# EAGLE board esquematico_placa (EAGLE 9.4.2)
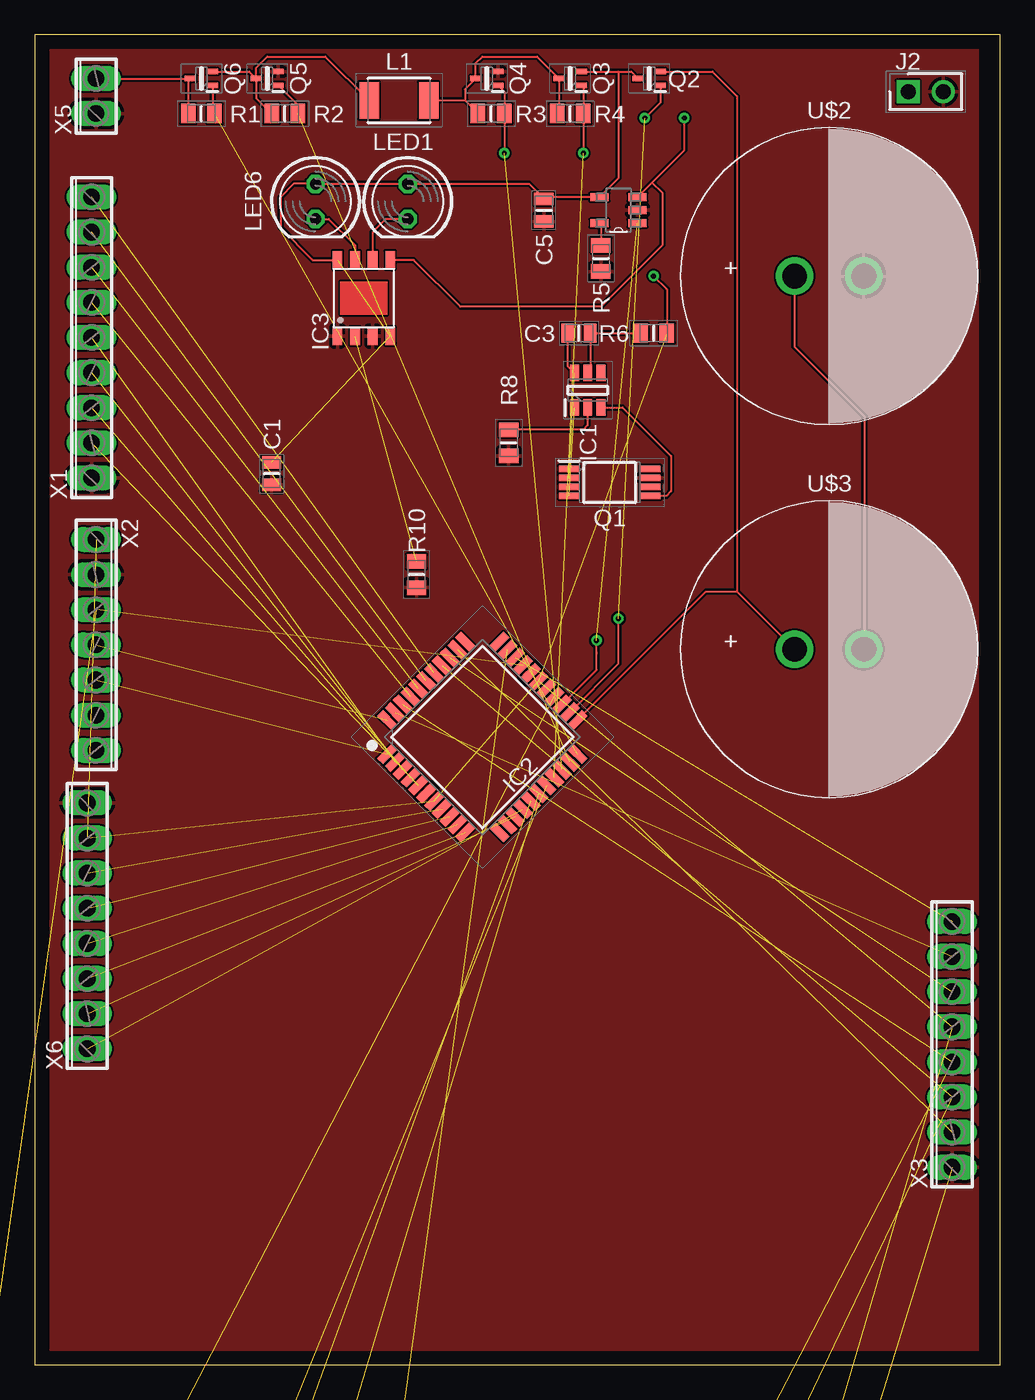
[diagram p0: board, top side]
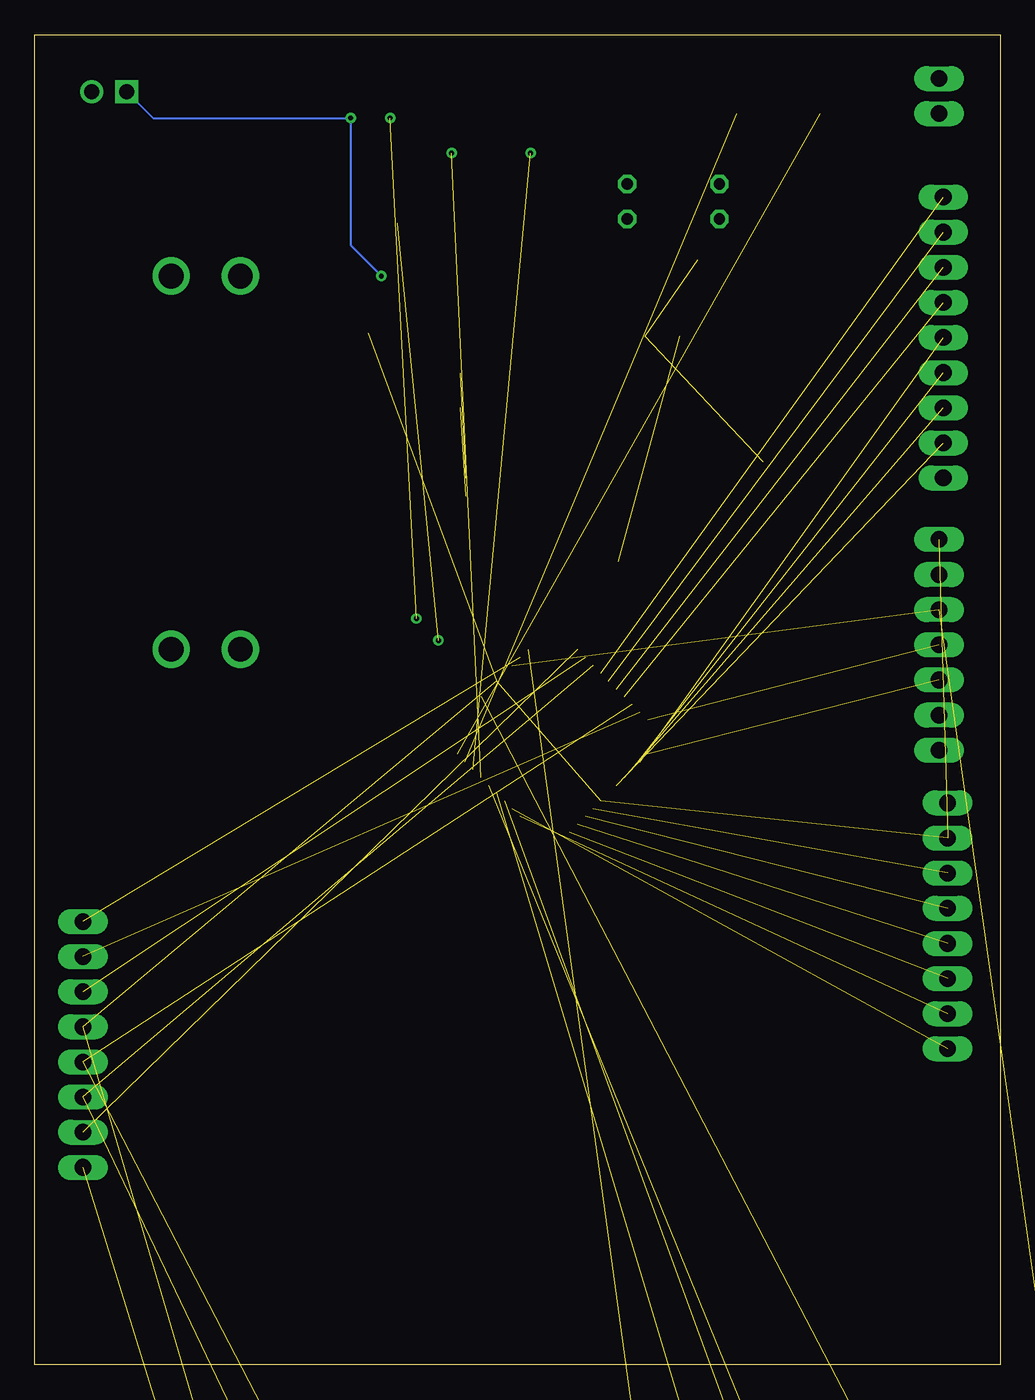
[diagram p1: board, bottom side, seen from below]

Size 69.85 x 96.2 mm. Coordinates in mm from the lower left corner, seen from the top.
Outline: 69.85,96.2 0,96.2 0,0 69.85,0 69.85,96.2
Copper layers (1*16): Top 0.035mm / dielectric 1.5mm / Bottom 0.035mm
Design rules "default": minimum track width 6mil, minimum drill 0.35mm, track to track 6mil, track to pad 6mil, pad to pad 6mil, via to via 6mil, smd to smd 6mil, copper to edge 40mil, drill to drill 6mil, minimum pad ring 10mil, minimum via ring 8mil, stop-mask expansion 4mil, vias tented up to drill 0mil, thermal gap 10mil

## Footprints (pad centres in the part's own frame; a part is rotated, then mirrored left to right if it is on the bottom)
CAPC2012X70N = smd 0.91 x 1.39: 1 -0.82,0; 2 0.82,0
SOT95P280X135-6N = smd 1.2 x 0.65: 1 -1.25,0.95; 2 -1.25,0; 3 -1.25,-0.95; 4 1.25,-0.95; 5 1.25,0; 6 1.25,0.95
QFP80P1200X1200X120-44N = smd 1.475 x 0.6: 1 -5.738,4; 2 -5.738,3.2; 3 -5.738,2.4; 4 -5.738,1.6; 5 -5.738,0.8; 6 -5.738,0; 7 -5.738,-0.8; 8 -5.738,-1.6; 9 -5.738,-2.4; 10 -5.738,-3.2; 11 -5.738,-4; 23 5.738,-4; 24 5.738,-3.2; 25 5.738,-2.4; 26 5.738,-1.6; 27 5.738,-0.8; 28 5.738,0; 29 5.738,0.8; 30 5.738,1.6; 31 5.738,2.4; 32 5.738,3.2; 33 5.738,4 | smd 0.6 x 1.475: 12 -4,-5.738; 13 -3.2,-5.738; 14 -2.4,-5.738; 15 -1.6,-5.738; 16 -0.8,-5.738; 17 0,-5.738; 18 0.8,-5.738; 19 1.6,-5.738; 20 2.4,-5.738; 21 3.2,-5.738; 22 4,-5.738; 34 4,5.738; 35 3.2,5.738; 36 2.4,5.738; 37 1.6,5.738; 38 0.8,5.738; 39 0,5.738; 40 -0.8,5.738; 41 -1.6,5.738; 42 -2.4,5.738; 43 -3.2,5.738; 44 -4,5.738
SOP-8 = smd 1.3 x 0.7: 1 -2.75,1.905; 2 -2.75,0.635; 3 -2.75,-0.635; 4 -2.75,-1.905; 5 2.75,-1.905; 6 2.75,-0.635; 7 2.75,0.635; 8 2.75,1.905
HDRV2W90P0X254_1X2_508X241X854 = drill 1.1 pad 1.65 square: 1 0,0 | drill 1.1 pad 1.65: 2 2.54,0
INDM4532X320N = smd 1.4 x 2.65: 1 -2.15,0; 2 2.15,0
LED5MM = drill 0.813 octagon: A -1.27,0; K 1.27,0
SOT95P300X145-5N = smd 1.321 x 0.559: 1 -1.372,0.94; 2 -1.372,0; 3 -1.372,-0.94; 4 1.372,-0.94; 5 1.372,0.94
SOP65P640X120-8N = smd 1.475 x 0.45: 1 -2.938,0.975; 2 -2.938,0.325; 3 -2.938,-0.325; 4 -2.938,-0.975; 5 2.938,-0.975; 6 2.938,-0.325; 7 2.938,0.325; 8 2.938,0.975
SOT50P160X90-3N = smd 0.8 x 0.4: 1 -0.8,0.5; 2 -0.8,-0.5; 3 0.8,0
RESC2012X70N = smd 1.05 x 1.4: 1 -0.95,0; 2 0.95,0
B3F-10XX = drill 1.016 long: 1 -3.251,2.261; 2 3.251,2.261; 3 -3.251,-2.261; 4 3.251,-2.261
QFN100P300X300X100-7N = smd 0.5 x 0.5: 1 -1.25,1; 2 -1.25,0; 3 -1.25,-1; 4 1.25,-1; 5 1.25,0; 6 1.25,1 | smd 1.5 x 2: PAD 0,-0.2
TEMP-HUM-SENSOR-DHT22 = drill 0.8 square: 1 -3.81,0 | drill 0.8: 2 -1.27,0; 3 1.27,0; 4 3.81,0
KW-5R5C105-R = drill 1.8 pad 2.7: 1 -2.5,0; 2 2.5,0
9POL254 = drill 1.2 long: 1 -10.16,0; 2 -7.62,0; 3 -5.08,0; 4 -2.54,0; 5 0,0; 6 2.54,0; 7 5.08,0; 8 7.62,0; 9 10.16,0
7POL254 = drill 1.2 long: 1 -7.62,0; 2 -5.08,0; 3 -2.54,0; 4 0,0; 5 2.54,0; 6 5.08,0; 7 7.62,0
8POL254 = drill 1.2 long: 1 -8.89,0; 2 -6.35,0; 3 -3.81,0; 4 -1.27,0; 5 1.27,0; 6 3.81,0; 7 6.35,0; 8 8.89,0
3POL254 = drill 1.2 long: 1 -2.54,0; 2 0,0; 3 2.54,0
2POL254 = drill 1.2 long: 1 -1.27,0; 2 1.27,0

## Placement (x,y rotation side)
C1  10uF  [CAPC2012X70N]  17.14,64.45 270 top
C2  10pF 25V  [CAPC2012X70N]  37.47,-76.52 0 top  (outside the outline)
C3  0.1uF  [CAPC2012X70N]  39.37,74.61 180 top
C4  0.1uF  [CAPC2012X70N]  -28.57,-75.88 0 top  (outside the outline)
C5  4.7 uF 16V  [CAPC2012X70N]  36.83,83.5 90 top
C6  4.7 uF 16V  [CAPC2012X70N]  -1.27,-79.69 0 top  (outside the outline)
C7  0.1uF 20V  [CAPC2012X70N]  -10.79,-79.69 0 top  (outside the outline)
C8  0.1uF 20V  [CAPC2012X70N]  -19.68,-79.69 0 top  (outside the outline)
C9  0.1uF 20V  [CAPC2012X70N]  -28.89,-79.69 0 top  (outside the outline)
IC1  DW01-P  [SOT95P280X135-6N]  40.01,70.48 90 top
IC2  PIC18F45K80  [QFP80P1200X1200X120-44N]  32.38,45.4 45 top
IC3  TP4056  [SOP-8]  23.81,77.15 90 top
J1  68001-202HLF  [HDRV2W90P0X254_1X2_508X241X854]  -40.01,-85.09 0 top  (outside the outline)
J2  68001-202HLF  [HDRV2W90P0X254_1X2_508X241X854]  63.18,92.08 0 top
L1  [INDM4532X320N]  26.35,91.44 0 top
LED1  [LED5MM]  26.99,84.14 270 top
LED2  [LED5MM]  -30.8,-147 180 top  (outside the outline)
LED3  [LED5MM]  -18.1,-147 180 top  (outside the outline)
LED4  [LED5MM]  -5.4,-147 180 top  (outside the outline)
LED5  [LED5MM]  7.3,-147 180 top  (outside the outline)
LED6  [LED5MM]  20.32,84.14 270 top
MCP  MCP73832T  [SOT95P300X145-5N]  42.23,83.5 180 top
Q1  FS8205A  [SOP65P640X120-8N]  41.59,63.82 0 top
Q2  [SOT50P160X90-3N]  44.45,93.03 180 top
Q3  [SOT50P160X90-3N]  38.73,93.03 180 top
Q4  [SOT50P160X90-3N]  32.7,93.03 180 top
Q5  [SOT50P160X90-3N]  16.83,93.03 180 top
Q6  [SOT50P160X90-3N]  12.06,93.03 180 top
R1  1M R  [RESC2012X70N]  12.06,90.49 180 top
R2  1M R  [RESC2012X70N]  18.1,90.49 180 top
R3  1M R  [RESC2012X70N]  33.02,90.49 180 top
R4  1M R  [RESC2012X70N]  38.73,90.49 180 top
R5  2K R  [RESC2012X70N]  40.96,80.01 90 top
R6  1K R  [RESC2012X70N]  44.77,74.61 0 top
R7  1K R  [RESC2012X70N]  -10.48,-72.07 0 top  (outside the outline)
R8  1K R  [RESC2012X70N]  34.29,66.67 270 top
R9  1K R  [RESC2012X70N]  -28.26,-72.07 0 top  (outside the outline)
R10  1.2K R  [RESC2012X70N]  27.62,57.15 270 top
R11  10K R  [RESC2012X70N]  21.59,-76.52 0 top  (outside the outline)
R12  10K R  [RESC2012X70N]  14.61,-75.88 0 top  (outside the outline)
R13  100 R  [RESC2012X70N]  7.62,-75.88 0 top  (outside the outline)
R14  100 R  [RESC2012X70N]  0.32,-75.88 0 top  (outside the outline)
R15  100 R  [RESC2012X70N]  -7.62,-75.88 0 top  (outside the outline)
R16  100 R  [RESC2012X70N]  -14.92,-75.88 0 top  (outside the outline)
S1  RESET  [B3F-10XX]  -17.46,-129.86 0 top  (outside the outline)
U1  HTU21D  [QFN100P300X300X100-7N]  -36.83,-97.16 0 top  (outside the outline)
U$1  TEMP-HUM-SENSOR-DHT22  [TEMP-HUM-SENSOR-DHT22]  12.38,-117.16 0 top  (outside the outline)
U$2  1F x 2,5 V  [KW-5R5C105-R]  57.47,78.74 0 top
U$3  1F x 2,5 V  [KW-5R5C105-R]  57.47,51.75 0 top
X1  [9POL254]  4.13,74.3 90 top
X2  [7POL254]  4.45,52.07 270 top
X3  [8POL254]  66.36,23.18 90 top
X4  [3POL254]  -29.53,-85.09 0 top  (outside the outline)
X5  INPUT  [2POL254]  4.45,91.76 90 top
X6  [8POL254]  3.81,31.75 90 top

## Library data of the parts
C1-C9 = 0805CAPACITOR; DESCRIPTION: MURATA - GRM2165C1H220JZ01D - CAP, MLCC, C0G/NP0, 22PF, 50V, 0805; HEIGHT: 0.7mm; MANUFACTURER_NAME: Murata Electronics; MANUFACTURER_PART_NUMBER: GRM2165C1H220JZ01D; MOUSER_PART_NUMBER: 81-GRM2165C1H220JZ; MOUSER_PRICE-STOCK: https://www.mouser.com/Search/Refine.aspx?Keyword=81-GRM2165C1H220JZ; RS_PART_NUMBER: 7236243P; RS_PRICE-STOCK: http://uk.rs-online.com/web/p/products/7236243P
IC1 = DW01-P; DESCRIPTION: hg; HEIGHT: 1.35mm; MANUFACTURER_NAME: Fortune Semiconductor Corporation; MANUFACTURER_PART_NUMBER: DW01-P
IC2 = PIC18F45K80-I_PT; ALLIED_NUMBER: 70047564; ALLIED_PRICE-STOCK: http://www.alliedelec.com/microchip-technology-inc-pic18f45k80-i-pt/70047564/; DESCRIPTION: MCU, 32kB Flash, ECAN, 12-bit ADC, CTMU; HEIGHT: 1.2mm; MANUFACTURER_NAME: Microchip; MANUFACTURER_PART_NUMBER: PIC18F45K80-I/PT; MOUSER_PART_NUMBER: 579-PIC18F45K80-I/PT; MOUSER_PRICE-STOCK: https://www.mouser.com/Search/Refine.aspx?Keyword=579-PIC18F45K80-I%2FPT; RS_PART_NUMBER: 8895477; RS_PRICE-STOCK: http://uk.rs-online.com/web/p/products/8895477
IC3 = TP4056
J1 J2 = CONN-2POS-2.54; ALLIED_NUMBER: 70236729; ALLIED_PRICE-STOCK: https://www.alliedelec.com/amphenol-fci-68001-202hlf/70236729/; DESCRIPTION: AMPHENOL FCI - 68001-202HLF - BOARD-BOARD CONNECTOR HEADER, 2 POSITION, 1ROW; HEIGHT: 8.54mm; MANUFACTURER_NAME: FCI; MANUFACTURER_PART_NUMBER: 68001-202HLF; MOUSER_PART_NUMBER: 649-68001-202HLF; MOUSER_PRICE-STOCK: https://www.mouser.com/Search/Refine.aspx?Keyword=649-68001-202HLF; RS_PART_NUMBER: 8632737; RS_PRICE-STOCK: http://uk.rs-online.com/web/p/products/8632737
L1 = B82432T1222K000; DESCRIPTION: EPCOS - B82432T1222K000 - INDUCTOR, 2.2UH, 1A, 10%, 1812C; HEIGHT: 3.2mm; MANUFACTURER_NAME: EPCOS; MANUFACTURER_PART_NUMBER: B82432T1222K000
LED1-LED6 = led
MCP = MCP73832T-5ACI_OT; AVAILABILITY: Unavailable; DESCRIPTION: Tiny Integrated Li-Ion/Li-Poly Charge mgnt controller, 4.5V Vreg out; MF: Microchip; MP: MCP73832T-5ACI/OT; PACKAGE: SOT-23 Microchip; PRICE: None
Q1 = FS8205A; DESCRIPTION: dual n-channel enhancement mode power MOFSET; HEIGHT: 1.2mm; MANUFACTURER_NAME: SII Semiconductor; MANUFACTURER_PART_NUMBER: FS8205A
Q2-Q6 = NTA4151PT1G; DESCRIPTION: ON Semiconductor NTA4151PT1G P-channel MOSFET Transistor, 0.76 A, -20 V, 3-Pin SC-75; HEIGHT: 0.9mm; MANUFACTURER_NAME: ON Semiconductor; MANUFACTURER_PART_NUMBER: NTA4151PT1G; MOUSER_PART_NUMBER: 863-NTA4151PT1G; MOUSER_PRICE-STOCK: https://www.mouser.com/Search/Refine.aspx?Keyword=863-NTA4151PT1G; RS_PART_NUMBER: 7800504P; RS_PRICE-STOCK: http://uk.rs-online.com/web/p/products/7800504P
R1-R16 = 0805RESISTOR; DESCRIPTION: Thick Film Resistors - SMD 0805 1.3Mohm 5% Anti Surge AEC-Q200; HEIGHT: 0.7mm; MANUFACTURER_NAME: Panasonic; MANUFACTURER_PART_NUMBER: ERJ-P06J135V; MOUSER_PART_NUMBER: 667-ERJ-P06J135V; MOUSER_PRICE-STOCK: https://www.mouser.com/Search/Refine.aspx?Keyword=667-ERJ-P06J135V
S1 = switch-omron; MPN: B3F-1000; OC_FARNELL: 176432; OC_NEWARK: 36M3542
U1 = HTU21D; AVAILABILITY: Unavailable; COMMENT: CAT-HSC0004; DESCRIPTION: Temp Sensor Digital Serial _2-Wire, I2C_ 6-Pin DFN; MF: TE Connectivity; MP: HTU21D; PACKAGE: DFN-6 Measurement Specialties; PRICE: None; TE_PURCHASE_URL: https://www.te.com/usa-en/product-CAT-HSC0004.html?te_bu=Cor&te_type=disp&te_campaign=seda_glo_cor-seda-global-disp-prtnr-fy19-seda-model-bom-cta_sma-317_1&elqCampaignId=32493
U$1 = diy-modules
U$2 U$3 = SCAP-KW-5R5C105-R
X1-X6 = con-phoenix-254; OC_FARNELL: unknown; OC_NEWARK: unknown

## Nets
AN: IC2.26 X4.1
BATSTAT: IC2.25 MCP.1
CE: IC2.35 X3.2
CSN: IC2.36 X3.6
DAT: IC2.32 U$1.2
DATA: IC2.42 R12.2 U1.1 X3.4
EN: IC2.30 R16.2 X2.3
GND: C1.2 C2.2 C4.2 C5.1 C6.1 C7.1 C8.1 C9.1 IC2.6 IC2.29 IC3.1 IC3.3 J2.2 LED2.K LED3.K LED4.K LED5.K MCP.2 Q1.7 Q4.2 Q5.2 R5.1 R8.2 R10.2 U1.2 U1.PAD U$1.4 U$2.2 X1.1 X2.2 X3.1 X4.3 X5.1 X6.8
ICSP_CLK_INPUT: IC2.17 J1.1 R14.2
ICSP_DATA_INPUT: IC2.16 J1.2 R15.2
IN+: Q6.3 R1.2 X5.2
IRC: IC2.31 X3.8
N$1: L1.1 Q5.3 Q6.2 R2.2
N$2: L1.2 Q3.3 Q4.3 R3.2 R4.2
N$3: LED2.A R13.1
N$4: MCP.5 R5.2
N$5: LED3.A R14.1
N$6: IC3.7 LED6.K
N$7: IC3.6 LED1.K
N$8: U$2.1 U$3.2
N$10: IC3.2 R10.1
N$11: R7.1 R9.2 S1.1
N$12: C3.1 IC1.5 R6.1
N$13: C8.2 S1.3
N$15: IC1.2 R8.1
N$16: IC1.3 Q1.5
N$17: LED4.A R15.1
N$18: LED5.A R16.1
N$21: IC1.1 Q1.4
OUT+: C1.1 C5.2 IC3.4 IC3.8 LED1.A LED6.A MCP.4 Q2.3 Q3.2
RB0: IC2.8 X6.6
RB1: IC2.9 X6.5
RB2: IC2.10 X6.4
RB3: IC2.11 X6.3
RB4: IC2.14 X6.2
RB5: IC2.15 X6.1
RD0: IC2.38 X1.9
RD1: IC2.39 X1.8
RD2: IC2.40 X1.7
RD3: IC2.41 X1.6
RD4: IC2.2 X1.5
RD5: IC2.3 X1.4
RD6: IC2.4 X1.3
RD7: IC2.5 X1.2
RE2: IC2.27
RESET: IC2.18 R7.2
RX: IC2.44 X2.4
SCL: IC2.37 R11.1 U1.6 X3.3
SDO: IC2.43 X3.7
SW1: IC2.22 Q6.1 R1.1
SW2: IC2.21 Q5.1 R2.1
SW3: IC2.20 Q4.1 R3.1
SW4: IC2.19 Q3.1 R4.1
SWCAP: IC2.24 Q2.1
TX: IC2.1 X2.5
VBAT: C2.1 C4.1 C6.2 C7.2 C9.2 IC2.7 IC2.28 IC3.5 J2.1 MCP.3 R6.2 R9.1 R11.2 R12.1 R13.2 U1.5 U$1.1 X2.1 X3.5 X4.2 X6.7
VCAP: IC2.23 Q2.2 U$3.1
VSSBAT: C3.2 IC1.6 Q1.2

## Tracks (layer width: path | path; a pad name or v marks a point on that pad's centre or on a via)
AN  (1 unrouted)
BATSTAT  (via drill 0.35)  (1 unrouted)
  Top 0.152: IC2.25 40.64,50.26 40.64,51.44 40.64,51.53 v40.64,52.39
CE  (1 unrouted)
CSN  (1 unrouted)
DAT  (1 unrouted)
DATA  (3 unrouted)
EN  (2 unrouted)
GND  (14 unrouted)
  pour Top: 68.26,95.57 0.64,95.57 0.64,0.64 68.26,0.64
ICSP_CLK_INPUT  (2 unrouted)
ICSP_DATA_INPUT  (2 unrouted)
IN+
  Top 0.152: X5.2 Q6.3 11.12,92.88 R1.2
IRC  (1 unrouted)
N$1
  Top 0.152: Q6.2 15.53,93.53 Q5.3 | Q5.3 16.03,91.61 R2.2 | Q5.3 16.03,93.81 16.83,94.61 21.03,94.61 L1.1
N$2
  Top 0.152: L1.2 31.12,91.44 | 31.12,91.44 R3.2 | 31.12,91.44 31.12,92.24 Q4.3 31.9,94.13 32.38,94.61 36.35,94.61 Q3.3 37.94,90.64 R4.2
N$3  (1 unrouted)
N$4
  Top 0.152: MCP.5 40.96,82.46 R5.2
N$5  (1 unrouted)
N$6
  Top 0.152: LED6.K 21.27,82.87 23.18,80.96 IC3.7
N$7
  Top 0.152: 24.45,80.33 IC3.6 24.45,81.92 25.4,82.87 LED1.K
N$8
  Top 0.152: U$2.1 54.97,73.62 60.01,68.58 60.01,51.79 U$3.2
N$10  (1 unrouted)
N$11  (2 unrouted)
N$12
  Top 0.152: IC1.5 40.19,71.92 C3.1 R6.1
N$13  (1 unrouted)
N$15
  Top 0.152: IC1.2 40.01,67.94 39.69,67.62 R8.1
N$16
  Top 0.152: IC1.3 42.52,69.23 46.04,65.72 46.04,63.18 45.7,62.84 Q1.5
N$17  (1 unrouted)
N$18  (1 unrouted)
N$21  (1 unrouted)
OUT+  (2 unrouted)
  Top 0.152: Q3.2 42.23,93.53 | 42.23,93.53 43.15,93.53 Q2.3 | 42.23,93.53 42.23,85.81 MCP.4 36.95,84.44 C5.2 35.74,85.41 LED1.A LED6.A 18.73,85.41 17.78,84.45 17.78,82.23 20.11,79.9 IC3.8
RB0  (1 unrouted)
RB1  (1 unrouted)
RB2  (1 unrouted)
RB3  (1 unrouted)
RB4  (1 unrouted)
RB5  (1 unrouted)
RD0  (1 unrouted)
RD1  (1 unrouted)
RD2  (1 unrouted)
RD3  (1 unrouted)
RD4  (1 unrouted)
RD5  (1 unrouted)
RD6  (1 unrouted)
RD7  (1 unrouted)
RESET  (1 unrouted)
RX  (1 unrouted)
SCL  (3 unrouted)
SDO  (1 unrouted)
SW1  (1 unrouted)
  Top 0.152: Q6.1 12.87,90.64 R1.1
SW2  (1 unrouted)
  Top 0.152: Q5.1 19.05,91.11 R2.1
SW3  (via drill 0.35)  (1 unrouted)
  Top 0.152: Q4.1 33.97,92.06 R3.1 v33.97,87.63
SW4  (via drill 0.35)  (1 unrouted)
  Top 0.152: Q3.1 39.69,92.38 R4.1 v39.69,87.63
SWCAP  (via drill 0.35)  (1 unrouted)
  Top 0.152: Q2.1 45.25,91.29 v44.13,90.17 | IC2.24 42.23,50.72 v42.23,53.98
TX  (1 unrouted)
VBAT  (via drill 0.35)  (17 unrouted)
  Top 0.152: MCP.3 44.67,85.51 | 44.67,85.51 46.99,87.83 v46.99,90.17 | v44.77,78.74 45.72,77.79 R6.2 | 44.67,85.51 45.4,84.77 45.4,80.96 40.96,76.52 30.8,76.52 27.41,79.9 IC3.5
  Bottom 0.152: J2.1 61.28,90.17 v46.99,90.17 46.99,80.96 v44.77,78.74
VCAP
  Top 0.152: Q2.2 49.03,93.53 50.8,91.76 50.8,55.92 | 50.8,55.92 U$3.1 | IC2.23 48.56,55.92 50.8,55.92
VSSBAT  (1 unrouted)
  Top 0.152: C3.2 38.55,72.24 IC1.6